# EAGLE board layout full (EAGLE 9.6.2)

No outline drawn. Coordinates in mm, seen from the top.
Copper layers (1*16): Top 0.035mm / dielectric 1.5mm / Bottom 0.035mm
Design rules "default": minimum track width 6mil, minimum drill 0.35mm, track to track 6mil, track to pad 6mil, pad to pad 6mil, via to via 6mil, smd to smd 6mil, copper to edge 40mil, drill to drill 6mil, minimum pad ring 10mil, minimum via ring 8mil, stop-mask expansion 4mil, vias tented up to drill 0mil, thermal gap 10mil

## Footprints (pad centres in the part's own frame; a part is rotated, then mirrored left to right if it is on the bottom)
DIL20 = drill 0.813 long: 1 -11.43,-3.81; 2 -8.89,-3.81; 3 -6.35,-3.81; 4 -3.81,-3.81; 5 -1.27,-3.81; 6 1.27,-3.81; 7 3.81,-3.81; 8 6.35,-3.81; 9 8.89,-3.81; 10 11.43,-3.81; 11 11.43,3.81; 12 8.89,3.81; 13 6.35,3.81; 14 3.81,3.81; 15 1.27,3.81; 16 -1.27,3.81; 17 -3.81,3.81; 18 -6.35,3.81; 19 -8.89,3.81; 20 -11.43,3.81
DIL16 = drill 0.813 long: 1 -8.89,-3.81; 2 -6.35,-3.81; 3 -3.81,-3.81; 4 -1.27,-3.81; 5 1.27,-3.81; 6 3.81,-3.81; 7 6.35,-3.81; 8 8.89,-3.81; 9 8.89,3.81; 10 6.35,3.81; 11 3.81,3.81; 12 1.27,3.81; 13 -1.27,3.81; 14 -3.81,3.81; 15 -6.35,3.81; 16 -8.89,3.81
DIL14 = drill 0.813 long: 1 -7.62,-3.81; 2 -5.08,-3.81; 3 -2.54,-3.81; 4 0,-3.81; 5 2.54,-3.81; 6 5.08,-3.81; 7 7.62,-3.81; 8 7.62,3.81; 9 5.08,3.81; 10 2.54,3.81; 11 0,3.81; 12 -2.54,3.81; 13 -5.08,3.81; 14 -7.62,3.81
DIL24-6 = drill 0.813 long: 1 -13.97,-7.62; 2 -11.43,-7.62; 3 -8.89,-7.62; 4 -6.35,-7.62; 5 -3.81,-7.62; 6 -1.27,-7.62; 7 1.27,-7.62; 8 3.81,-7.62; 9 6.35,-7.62; 10 8.89,-7.62; 11 11.43,-7.62; 12 13.97,-7.62; 13 13.97,7.62; 14 11.43,7.62; 15 8.89,7.62; 16 6.35,7.62; 17 3.81,7.62; 18 1.27,7.62; 19 -1.27,7.62; 20 -3.81,7.62; 21 -6.35,7.62; 22 -8.89,7.62; 23 -11.43,7.62; 24 -13.97,7.62

## Placement (x,y rotation side)
E$1  [DIL20]  24.13,19.05 0 top
E$2  [DIL16]  58.42,19.05 0 top
E$3  [DIL20]  91.44,19.05 0 top
E$4  [DIL14]  124.46,19.05 0 top
E$5  [DIL16]  152.4,19.05 0 top
E$6  [DIL14]  152.4,54.61 0 top
E$7  [DIL14]  21.59,54.61 0 top
E$8  [DIL14]  184.15,19.05 0 top
E$9  [DIL14]  214.63,19.05 0 top
E$10  [DIL16]  247.65,19.05 0 top
E$11  [DIL16]  281.94,19.05 0 top
E$12  [DIL14]  313.69,19.05 0 top
E$13  [DIL14]  184.15,54.61 0 top
E$14  [DIL14]  214.63,54.61 0 top
E$15  [DIL14]  246.38,54.61 0 top
E$16  [DIL16]  278.13,54.61 0 top
E$17  [DIL16]  311.15,54.61 0 top
E$18  [DIL24-6]  186.69,90.17 0 top
E$19  [DIL14]  214.63,90.17 0 top
E$20  [DIL14]  236.22,90.17 0 top
E$21  [DIL24-6]  267.97,90.17 0 top
E$22  [DIL14]  295.91,90.17 0 top
E$23  [DIL14]  317.5,90.17 0 top
E$24  [DIL24-6]  186.69,125.73 0 top
E$25  [DIL14]  214.63,125.73 0 top
E$26  [DIL14]  236.22,125.73 0 top
E$27  [DIL24-6]  267.97,125.73 0 top
E$28  [DIL14]  295.91,125.73 0 top
E$29  [DIL14]  317.5,125.73 0 top
E$30  [DIL24-6]  186.69,161.29 0 top
E$31  [DIL14]  214.63,161.29 0 top
E$32  [DIL14]  22.86,90.17 0 top
E$33  [DIL14]  46.99,90.17 0 top
E$34  [DIL16]  72.39,90.17 0 top
E$35  [DIL16]  99.06,90.17 0 top
E$36  [DIL16]  127,90.17 0 top
E$37  [DIL16]  153.67,90.17 0 top
E$38  [DIL20]  30.48,125.73 0 top
E$39  [DIL16]  66.04,125.73 0 top
E$40  [DIL20]  104.14,125.73 0 top
E$41  [DIL20]  146.05,125.73 0 top
E$42  [DIL20]  30.48,161.29 0 top
E$43  [DIL20]  66.04,161.29 0 top
E$44  [DIL16]  22.86,196.85 0 top
E$45  [DIL14]  48.26,196.85 0 top
E$46  [DIL14]  72.39,196.85 0 top
E$47  [DIL16]  125.73,196.85 0 top
E$48  [DIL16]  152.4,196.85 0 top
E$49  [DIL24-6]  25.4,232.41 0 top
E$50  [DIL16]  99.06,196.85 0 top
E$51  [DIL14]  54.61,232.41 0 top
E$52  [DIL14]  77.47,232.41 0 top
E$53  [DIL14]  100.33,232.41 0 top
E$54  [DIL16]  123.19,232.41 0 top
E$55  [DIL20]  151.13,232.41 0 top
E$56  [DIL20]  190.5,196.85 0 top
E$57  [DIL16]  231.14,196.85 0 top
E$58  [DIL16]  269.24,196.85 0 top
E$59  [DIL14]  306.07,196.85 0 top
E$60  [DIL14]  231.14,232.41 0 top
E$61  [DIL14]  267.97,232.41 0 top
E$62  [DIL20]  191.77,232.41 0 top
E$63  [DIL16]  307.34,232.41 0 top
E$64  [DIL14]  182.88,267.97 0 top
E$65  [DIL16]  208.28,267.97 0 top
E$66  [DIL14]  233.68,267.97 0 top
E$67  [DIL16]  260.35,267.97 0 top
E$68  [DIL16]  285.75,267.97 0 top
E$69  [DIL20]  314.96,267.97 0 top
E$72  [DIL20]  154.94,267.97 0 top
E$73  [DIL16]  125.73,267.97 0 top

## Library data of the parts
E$1-E$69 E$72 E$73 = 40xx

## Text on the board
tPlace: 4076 | 74374 | 7432 | 4043 | 7404 | 4076 | 4076 | 74374 | JSR | JSR | 74181 | 7408 | 7408 | 7404 | 4076 | 74245 | 74245 | 7408 | 7408 | 7432 | ALU | FLAGS | 4043 | 7432 | 7432 | 4043 | 4042 | 4042 | 74374 | 7432 | 4043 | 7404 | ALU | FLAGS | 74245 | 74245 | PC | DECODER | 7408 | AT28C16 | 74374 | 4076 | 74245 | 74245 | PC | DECODER | 7408 | 7408 | 7408 | 7408 | AT28C16 | AT28C16 | 7432 | 7404 | 4043 | 74193 | 74193 | 74193 | DECODER | PC | 7408 | 7408 | 7408 | 7408 | AT28C16 | AT28C16 | 4040 | 7432 | 7404 | 7474 | 4017 | 74126 | 7404 | IO BUFFER | DECODER | 74374 | 4076 | 74374 | 7432 | 4043 | 7408 | 7432 | 4017 | 4043 | 7404 | IO BUFFER | CU | IO BOARD | IO BOARD